# Altium PCB sinking-clock_LED-PCB.PcbDoc (part 1 of 2)
Units mm, origin at the board's own origin, x right, y up, seen from the top; angles counter-clockwise.
Board outline 156.7 x 83 mm, 2 copper layers (Top Layer, Bottom Layer); 144 components, 146 nets, 484 pads, 126 vias.
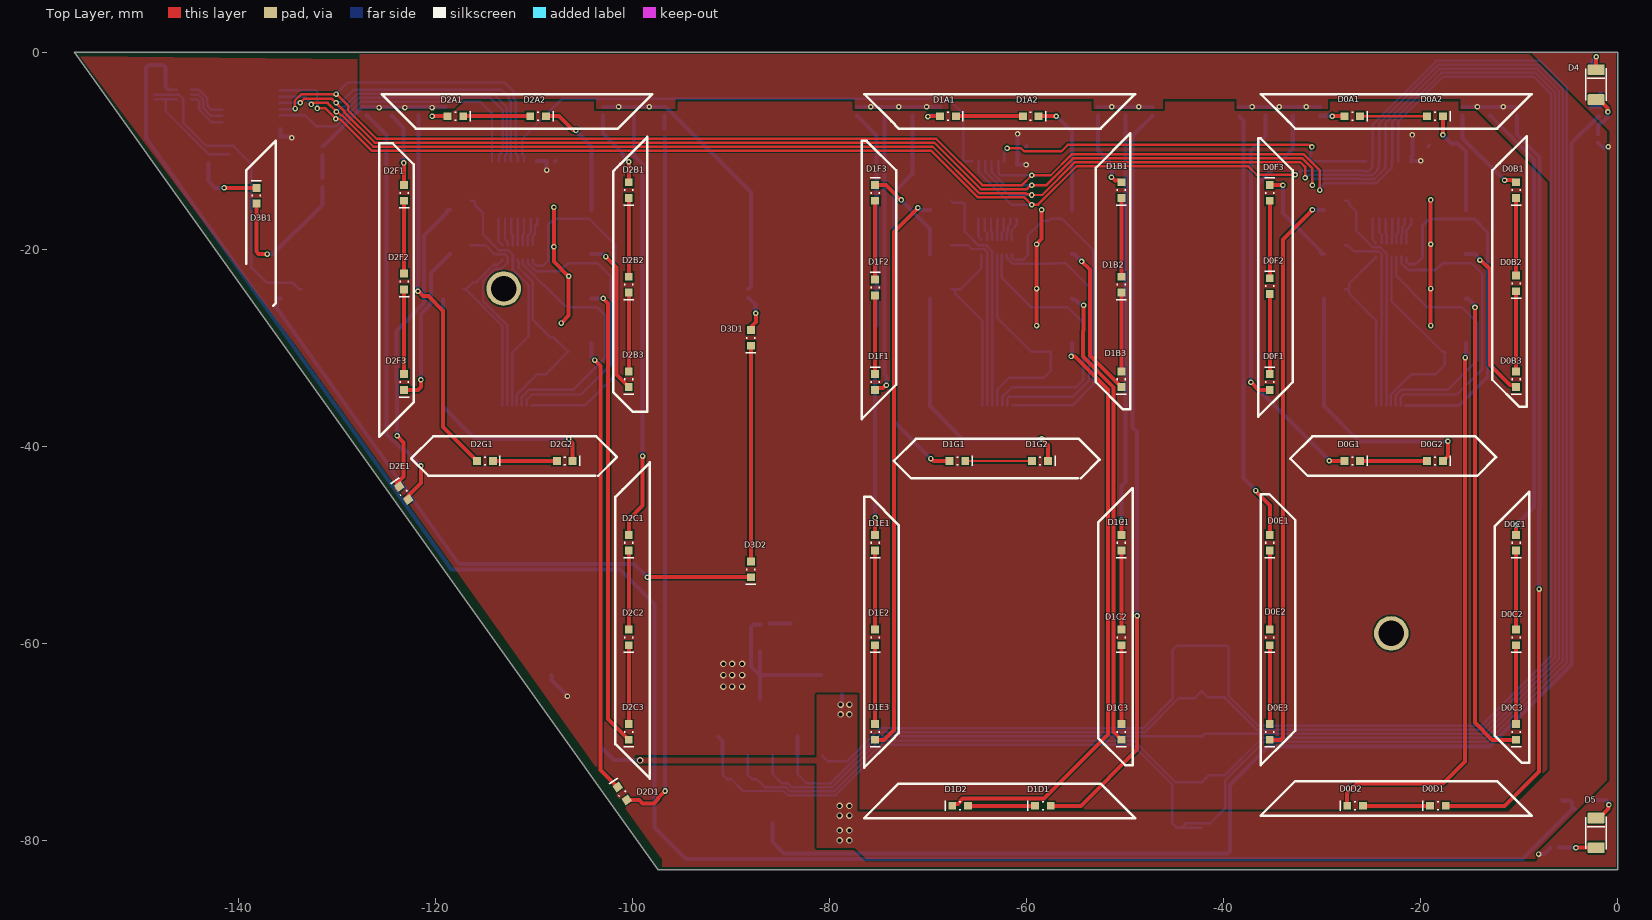
[diagram p0: Top Layer view]
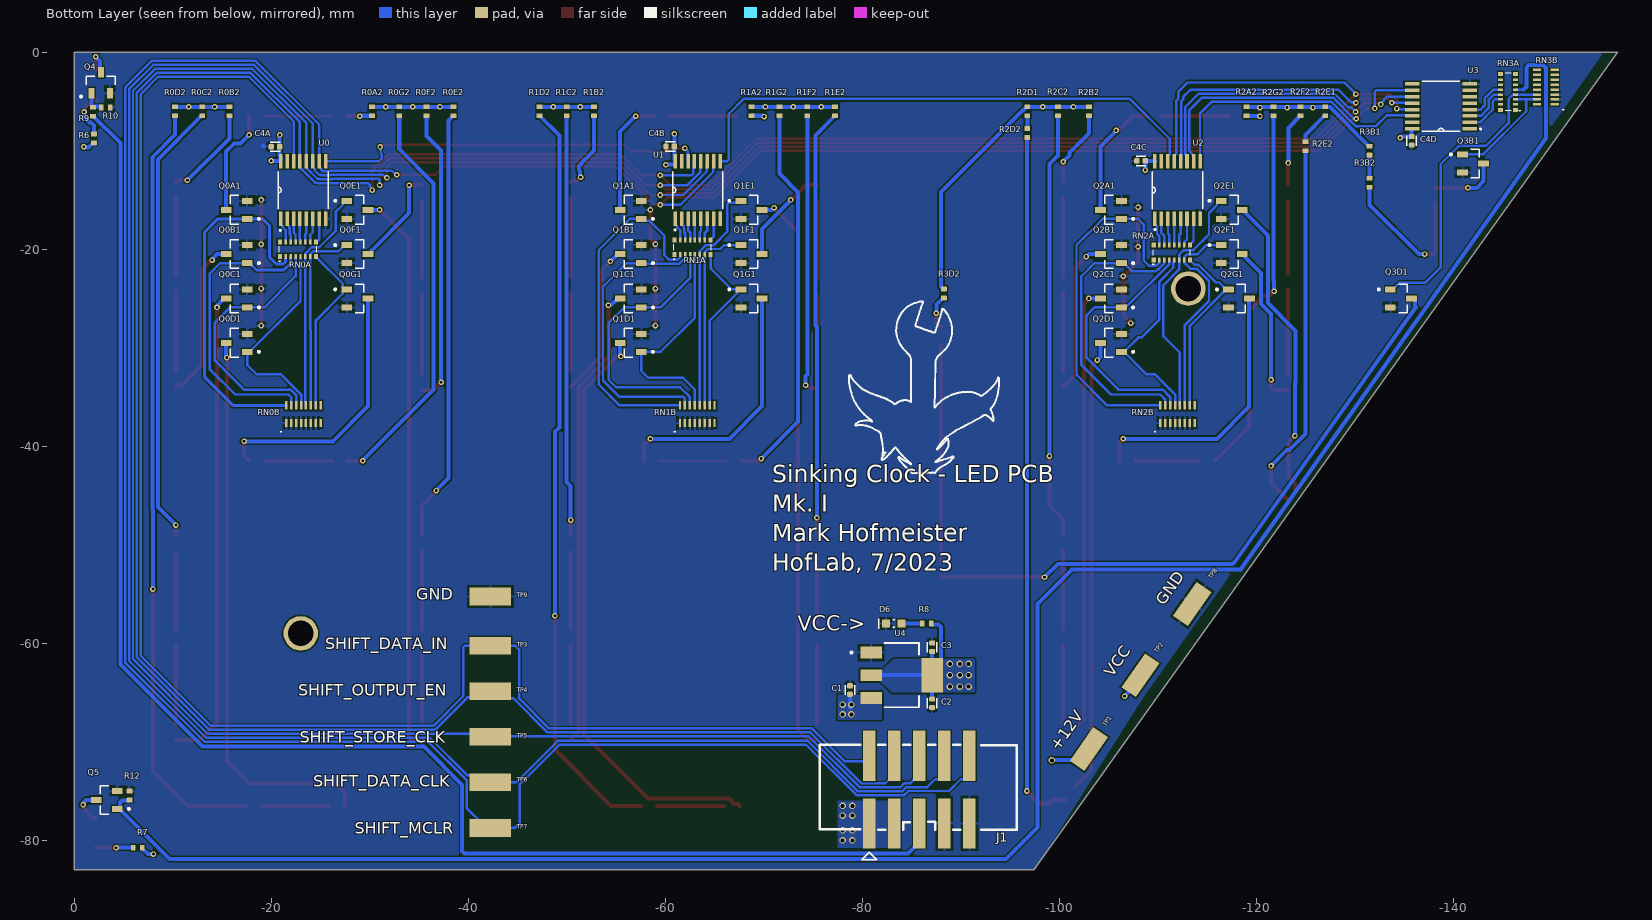
[diagram p1: Bottom Layer view, seen from below]
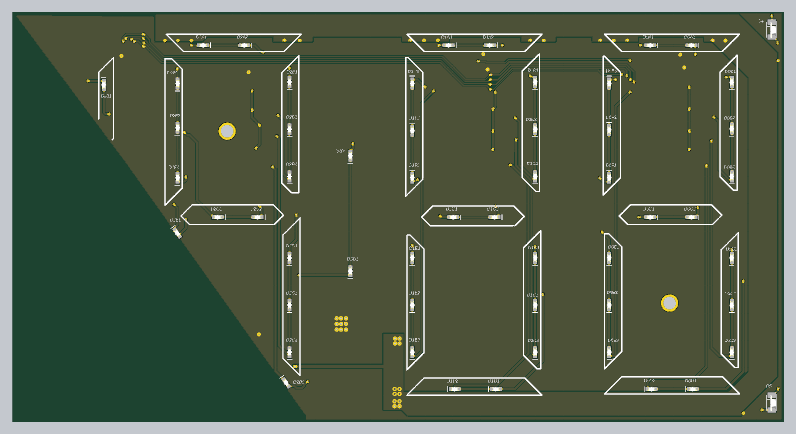
[diagram p3: 3D render of the assembled board from above, using the file's embedded part models]
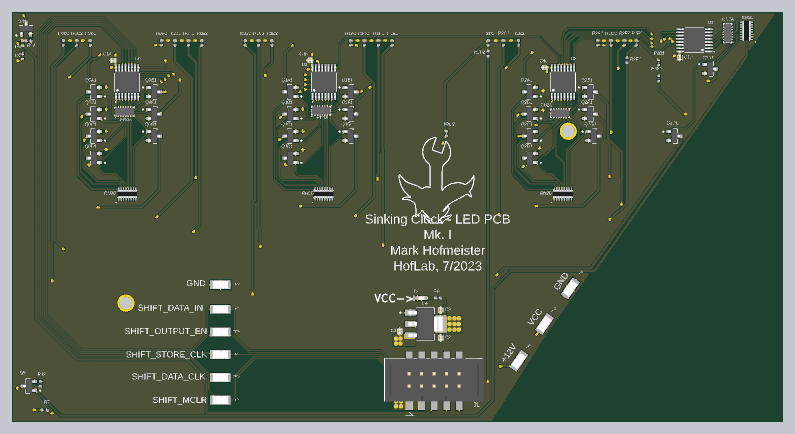
[diagram p4: 3D render of the assembled board from below, using the file's embedded part models]

## Layer stack, top to bottom
Top Solder: solder mask 0.0102, Solder Resist, Dk 3.5
Top Layer: signal copper 0.0356
Dielectric 1: dielectric 0.32, FR-4, Dk 4.8
Bottom Layer: signal copper 0.0356
Bottom Solder: solder mask 0.0102, Solder Resist, Dk 3.5

## Board outline
-97.4,-83 -156.7,0 0,0 0,-83

## Design rules (kind name [scope] priority, off if disabled: settings)
Clearance "Power Planes" [InNet('+12') vs InNet('VCC')] p1: gap=0.152 ignorepadtopadclearanceinfootprint=TRUE except(0: Arc-Hole Track-Hole SMDPad-Hole THPad-Hole Via-Hole Fill-Hole Poly-Hole Region-Hole Text-Hole; 0.254: Arc-Arc Arc-Track Arc-Fill Arc-Poly Arc-Region Track-Track Track-Fill Track-Poly Track-Region Fill-Fill Fill-Poly Fill-Region Poly-Poly Poly-Region Region-Region)
Clearance [All] p2: gap=0.152 ignorepadtopadclearanceinfootprint=FALSE except(0: Arc-Hole Track-Hole SMDPad-Hole THPad-Hole Via-Hole Fill-Hole Poly-Hole Region-Hole Text-Hole)
HoleSize [All] p1: absolutevalues=TRUE maxlimit=2.7 minlimit=0.152 maxpercent=80.000 minpercent=20.000
MinimumSolderMaskSliver [All] p1: minsoldermaskwidth=0.025
PolygonConnect PolygonConnect_2 [InNet('VCC')] p1: connectstyle=Direct reliefconductorwidth=0.254 reliefentries=4 polygonreliefangle="90 Angle" airgapwidth=0.254
PolygonConnect PolygonConnect_1 [InNet('+12')] p2: connectstyle=Direct reliefconductorwidth=0.254 reliefentries=4 polygonreliefangle="90 Angle" airgapwidth=0.254
PolygonConnect [All] p3: connectstyle=Relief reliefconductorwidth=0.254 reliefentries=4 polygonreliefangle="90 Angle" airgapwidth=0.254
RoomDefinition U_LED-PCB_DIG2 [InComponentClass('U_LED-PCB_DIG2')] p1: confinementstyle=ConfineIn formatcopy=TRUE lockcomponents=FALSE outline -127.829,-7.229 -127.829,-4.771 -95.921,-4.771 -95.921,-9.434 -99.315,-9.434 -99.315,-77.195 -102.885,-77.195 -102.885,-46.699 -125.067,-46.699 -125.067,-10.774 -125.829,-10.774 -125.829,-7.229
RoomDefinition LED-PCB_Master [InComponentClass('LED-PCB_Master')] p2: confinementstyle=ConfineIn formatcopy=TRUE lockcomponents=FALSE outline -116.097,-58.916 -116.097,-53.084 -4.679,-53.084 -4.679,-0.956 -3.579,-0.956 -3.579,-0.711 -0.821,-0.711 -0.821,-0.956 -0.246,-0.956 -0.246,-5.244 -0.821,-5.244 -0.821,-81.839 -75.319,-81.839 -75.319,-82.279 -96.081,-82.279 -96.081,-73.666 -105.597,-73.666 -105.597,-66.166 -110.847,-66.166 -110.847,-58.916
RoomDefinition U_LED-PCB_DIG1 [InComponentClass('U_LED-PCB_DIG1')] p3: confinementstyle=ConfineIn formatcopy=TRUE lockcomponents=FALSE outline -78.079,-7.229 -78.079,-4.771 -46.421,-4.771 -46.421,-7.229 -49.471,-7.229 -49.471,-70.842 -56.635,-70.842 -56.635,-77.429 -68.606,-77.429 -68.606,-70.842 -76.329,-70.842 -76.329,-35.215 -76.329,-7.229
RoomDefinition U_LED-PCB_DIG3 [InComponentClass('U_LED-PCB_DIG3')] p4: confinementstyle=ConfineIn formatcopy=TRUE lockcomponents=FALSE outline -151.532,-6.19 -151.532,-1.021 -147.536,-1.021 -147.536,-0.871 -143.578,-0.871 -143.578,-2.63 -134.737,-2.63 -134.737,-8.771 -130.671,-8.771 -130.671,-23.255 -87.449,-23.255 -87.449,-27.271 -87.071,-27.271 -87.071,-54.341 -88.929,-54.341 -88.929,-26.979 -136.824,-26.979 -136.824,-16.301 -139.129,-16.301 -139.129,-13.279 -144.144,-13.279 -144.144,-7.229 -147.536,-7.229 -147.536,-6.19
RoomDefinition U_LED-PCB_DIG0 [InComponentClass('U_LED-PCB_DIG0')] p5: confinementstyle=ConfineIn formatcopy=TRUE lockcomponents=FALSE outline -39.329,-7.229 -39.329,-4.771 -9.421,-4.771 -9.421,-12.271 -9.401,-12.271 -9.401,-70.842 -16.54,-70.842 -16.54,-77.429 -28.511,-77.429 -28.511,-70.842 -36.259,-70.842 -36.259,-35.215 -36.259,-7.229
RoutingVias [All] p1: holewidth=0.279 width=0.559 viastyle="Through Hole" minholewidth=0.203 minwidth=0.406 maxholewidth=0.711 maxwidth=1.27
SilkToSolderMaskClearance [IsPad] p1: minsilkscreentomaskgap=0.1 clearancetoexposedcopper=TRUE
SolderMaskExpansion [All] p1: expansion=0.102 istentingtop=FALSE
UnRoutedNet [All] p1: checkbadconnections=TRUE
Width [All] p1: maxlimit=1.27 minlimit=0.152 preferedwidth=0.406 minimp=50.000000 maximp=50.000000 favimp=50.000000
26 further rules are at their usual default settings.

## Classes and differential pairs
component class U_LED-PCB_DIG3: C4D D3B1 D3D1 D3D2 Q3B1 Q3D1 R3B1 R3B2 R3D2 RN3A RN3B U3
component class U_LED-PCB_DIG2: C4C D2A1 D2A2 D2B1 D2B2 D2B3 D2C1 D2C2 D2C3 D2D1 D2E1 D2F1 D2F2 D2F3 D2G1 D2G2 Q2A1 Q2B1 Q2C1 Q2D1 Q2E1 Q2F1 Q2G1 R2A2 R2B2 R2C2 R2D1 R2D2 R2E1 R2E2 R2F2 R2G2 RN2A RN2B U2
component class U_LED-PCB_DIG1: C4B D1A1 D1A2 D1B1 D1B2 D1B3 D1C1 D1C2 D1C3 D1D1 D1D2 D1E1 D1E2 D1E3 D1F1 D1F2 D1F3 D1G1 D1G2 Q1A1 Q1B1 Q1C1 Q1D1 Q1E1 Q1F1 Q1G1 R1A2 R1B2 R1C2 R1D2 R1E2 R1F2 R1G2 RN1A RN1B U1
component class U_LED-PCB_DIG0: C4A D0A1 D0A2 D0B1 D0B2 D0B3 D0C1 D0C2 D0C3 D0D1 D0D2 D0E1 D0E2 D0E3 D0F1 D0F2 D0F3 D0G1 D0G2 Q0A1 Q0B1 Q0C1 Q0D1 Q0E1 Q0F1 Q0G1 R0A2 R0B2 R0C2 R0D2 R0E2 R0F2 R0G2 RN0A RN0B U0
component class LED-PCB_Master: C1 C2 C3 D4 D5 D6 J1 Q4 Q5 R6 R7 R8 R9 R10 R12 TP1 TP2 TP3 TP4 TP5 TP6 TP7 TP8 TP9 U4

## Components (designator, comment, footprint, x,y, rotation, side; value= is the part's Value field where it differs from the comment)
C1 "CAP" "0402 CAP" -78.75,-64.75 r270 bottom value=10uF
C2 "CAP" "0402 CAP" -87.1,-66.1 r90 bottom value=10uF
C3 "CAP" "0402 CAP" -87.1,-60.408 r270 bottom value=10uF
C4A "CAP" "0402 CAP" -20.43,-9.6 r180 bottom value=1uF
C4B "CAP" "0402 CAP" -60.5,-9.575 r180 bottom value=1uF
C4C "CAP" "0402 CAP" -108.302,-11.026 r180 bottom value=1uF
C4D "CAP" "0402 CAP" -135.776,-9 r270 bottom value=1uF
D0A1 "LED - single" "LED - 0603" -26.955,-6.5 r0 top locked
D0A2 "LED - single" "LED - 0603" -18.555,-6.5 r0 top locked
D0B1 "LED - single" "LED - 0603" -10.33,-14 r270 top locked
D0B2 "LED - single" "LED - 0603" -10.33,-23.47 r270 top locked
D0B3 "LED - single" "LED - 0603" -10.33,-33.2 r270 top locked
D0C1 "LED - single" "LED - 0603" -10.33,-49.8 r270 top locked
D0C2 "LED - single" "LED - 0603" -10.33,-59.4 r270 top locked
D0C3 "LED - single" "LED - 0603" -10.33,-69 r270 top locked
D0D1 "LED - single" "LED - 0603" -18.269,-76.5 r180 top locked
D0D2 "LED - single" "LED - 0603" -26.669,-76.5 r180 top locked
D0E1 "LED - single" "LED - 0603" -35.33,-49.8 r270 top locked
D0E2 "LED - single" "LED - 0603" -35.33,-59.4 r270 top locked
D0E3 "LED - single" "LED - 0603" -35.33,-69 r270 top locked
D0F1 "LED - single" "LED - 0603" -35.33,-33.486 r90 top locked
D0F2 "LED - single" "LED - 0603" -35.33,-23.756 r90 top locked
D0F3 "LED - single" "LED - 0603" -35.33,-14.286 r90 top locked
D0G1 "LED - single" "LED - 0603" -26.955,-41.5 r0 top locked
D0G2 "LED - single" "LED - 0603" -18.555,-41.5 r0 top locked
D1A1 "LED - single" "LED - 0603" -68,-6.5 r0 top locked
D1A2 "LED - single" "LED - 0603" -59.6,-6.5 r0 top locked
D1B1 "LED - single" "LED - 0603" -50.4,-14 r270 top locked
D1B2 "LED - single" "LED - 0603" -50.4,-23.6 r270 top locked
D1B3 "LED - single" "LED - 0603" -50.4,-33.2 r270 top locked
D1C1 "LED - single" "LED - 0603" -50.4,-49.8 r270 top locked
D1C2 "LED - single" "LED - 0603" -50.4,-59.4 r270 top locked
D1C3 "LED - single" "LED - 0603" -50.4,-69 r270 top locked
D1D1 "LED - single" "LED - 0603" -58.364,-76.5 r180 top
D1D2 "LED - single" "LED - 0603" -66.764,-76.5 r180 top
D1E1 "LED - single" "LED - 0603" -75.4,-49.8 r270 top locked
D1E2 "LED - single" "LED - 0603" -75.4,-59.4 r270 top locked
D1E3 "LED - single" "LED - 0603" -75.4,-69 r270 top locked
D1F1 "LED - single" "LED - 0603" -75.4,-33.486 r90 top locked
D1F2 "LED - single" "LED - 0603" -75.4,-23.886 r90 top locked
D1F3 "LED - single" "LED - 0603" -75.4,-14.286 r90 top locked
D1G1 "LED - single" "LED - 0603" -67.05,-41.5 r0 top
D1G2 "LED - single" "LED - 0603" -58.65,-41.5 r0 top
D2A1 "LED - single" "LED - 0603" -118,-6.5 r0 top locked
D2A2 "LED - single" "LED - 0603" -109.6,-6.5 r0 top locked
D2B1 "LED - single" "LED - 0603" -100.4,-14 r270 top locked
D2B2 "LED - single" "LED - 0603" -100.4,-23.6 r270 top locked
D2B3 "LED - single" "LED - 0603" -100.4,-33.2 r270 top locked
D2C1 "LED - single" "LED - 0603" -100.4,-49.8 r270 top locked
D2C2 "LED - single" "LED - 0603" -100.4,-59.4 r270 top locked
D2C3 "LED - single" "LED - 0603" -100.4,-69 r270 top locked
D2D1 "LED - single" "LED - 0603" -101.068,-75.246 r125 top
D2E1 "LED - single" "LED - 0603" -123.25,-44.75 r125 top
D2F1 "LED - single" "LED - 0603" -123.2,-14.286 r270 top locked
D2F2 "LED - single" "LED - 0603" -123.2,-23.286 r270 top locked
D2F3 "LED - single" "LED - 0603" -123.2,-33.486 r270 top locked
D2G1 "LED - single" "LED - 0603" -115,-41.5 r0 top locked
D2G2 "LED - single" "LED - 0603" -106.9,-41.5 r0 top locked
D3B1 "LED - single" "LED - 0603" -138.2,-14.572 r90 top locked
D3D1 "LED - single" "LED - 0603" -88,-29 r270 top locked
D3D2 "LED - single" "LED - 0603" -88,-52.5 r270 top locked
D4 "LED - single" "LED - 1206 RIGHT ANGLE" -2.2,-3.3 r90 top
D5 "LED - single" "LED - 1206 RIGHT ANGLE" -2.2,-79.25 r90 top
D6 "LED - single" "LED - 0603" -83.2,-58 r0 bottom
J1 "5x2, 0.1' pitch SMT header" "5x2, 0.1' pitch SMT header" -85.8,-74.85 r180 bottom
Q0A1 "NMOS" SOT-23 -16.5,-16 r0 bottom
Q0B1 "NMOS" SOT-23 -16.5,-20.5 r0 bottom
Q0C1 "NMOS" SOT-23 -16.5,-25 r0 bottom
Q0D1 "NMOS" SOT-23 -16.5,-29.5 r0 bottom
Q0E1 "NMOS" SOT-23 -28.75,-16 r180 bottom
Q0F1 "NMOS" SOT-23 -28.75,-20.5 r180 bottom
Q0G1 "NMOS" SOT-23 -28.75,-25 r180 bottom
Q1A1 "NMOS" SOT-23 -56.5,-16 r0 bottom
Q1B1 "NMOS" SOT-23 -56.5,-20.5 r0 bottom
Q1C1 "NMOS" SOT-23 -56.5,-25 r0 bottom
Q1D1 "NMOS" SOT-23 -56.5,-29.5 r0 bottom
Q1E1 "NMOS" SOT-23 -68.75,-16 r180 bottom
Q1F1 "NMOS" SOT-23 -68.75,-20.5 r180 bottom
Q1G1 "NMOS" SOT-23 -68.75,-25 r180 bottom
Q2A1 "NMOS" SOT-23 -105.25,-16 r0 bottom
Q2B1 "NMOS" SOT-23 -105.25,-20.5 r0 bottom
Q2C1 "NMOS" SOT-23 -105.25,-25 r0 bottom
Q2D1 "NMOS" SOT-23 -105.25,-29.5 r0 bottom
Q2E1 "NMOS" SOT-23 -117.5,-16 r180 bottom
Q2F1 "NMOS" SOT-23 -117.5,-20.5 r180 bottom
Q2G1 "NMOS" SOT-23 -118.25,-25 r180 bottom
Q3B1 "NMOS" SOT-23 -142,-11.3 r180 bottom
Q3D1 "NMOS" SOT-23 -134.68,-25 r180 bottom
Q4 "NMOS" SOT-23 -2.7,-3.1 r90 bottom
Q5 "NMOS" SOT-23 -3.3,-75.9 r0 bottom
R0A2 "RES" "0402 RES" -30.25,-6 r90 bottom value=330
R0B2 "RES" "0402 RES" -15.75,-6 r90 bottom value=240
R0C2 "RES" "0402 RES" -13,-6 r90 bottom value=240
R0D2 "RES" "0402 RES" -10.25,-6 r90 bottom value=330
R0E2 "RES" "0402 RES" -38.5,-6 r90 bottom value=240
R0F2 "RES" "0402 RES" -35.75,-6 r90 bottom value=240
R0G2 "RES" "0402 RES" -33,-6 r90 bottom value=330
R1A2 "RES" "0402 RES" -68.75,-6 r90 bottom value=330
R1B2 "RES" "0402 RES" -52.75,-6 r90 bottom value=240
R1C2 "RES" "0402 RES" -50,-6 r90 bottom value=240
R1D2 "RES" "0402 RES" -47.25,-6 r90 bottom value=330
R1E2 "RES" "0402 RES" -77.25,-6 r90 bottom value=240
R1F2 "RES" "0402 RES" -74.417,-6 r90 bottom value=240
R1G2 "RES" "0402 RES" -71.583,-6 r90 bottom value=330
R2A2 "RES" "0402 RES" -119,-6 r90 bottom value=330
R2B2 "RES" "0402 RES" -103,-6 r90 bottom value=240
R2C2 "RES" "0402 RES" -99.875,-6 r90 bottom value=240
R2D1 "RES" "0402 RES" -96.75,-6 r90 bottom value=330
R2D2 "RES" "0402 RES" -96.75,-8.205 r90 bottom value=56
R2E1 "RES" "0402 RES" -127,-6 r90 bottom value=330
R2E2 "RES" "0402 RES" -125,-9.545 r90 bottom value=56
R2F2 "RES" "0402 RES" -124.5,-6 r90 bottom value=240
R2G2 "RES" "0402 RES" -121.75,-6 r90 bottom value=330
R3B1 "RES" "0402 RES" -131.5,-10 r90 bottom value=330
R3B2 "RES" "0402 RES" -131.5,-13.25 r90 bottom value=56
R3D2 "RES" "0402 RES" -88.278,-24.484 r90 bottom value=330
R6 "RES" "0402 RES" -2,-8.75 r90 bottom value=56
R7 "RES" "0402 RES" -6.455,-80.76 r0 bottom value=56
R8 "RES" "0402 RES" -86.545,-58 r180 bottom value=56
R9 "RES" 0402R -1.929,-6.054 r90 bottom value=330
R10 "RES" 0402R -3.2,-5.6 r0 bottom value=10k
R12 "RES" 0402R -5.636,-75.445 r270 bottom value=10k
RN0A "8 res Array" EXB2HV331JV -22.727,-20.01 r180 bottom value=330
RN0B "8.2k - all" MNR18ERAPJ822 -23.281,-36.75 r90 bottom
RN1A "8 res Array" EXB2HV331JV -62.77,-19.802 r180 bottom value=330
RN1B "8.2k - all" MNR18ERAPJ822 -63.25,-36.75 r90 bottom
RN2A "8 res Array" EXB2HV331JV -111.42,-20.335 r180 bottom value=330
RN2B "8.2k - all" MNR18ERAPJ822 -112,-36.75 r90 bottom
RN3A "8 res Array" EXB2HV331JV -145.557,-4.05 r90 bottom value=330
RN3B "8.2k - all" MNR18ERAPJ822 -149.4,-3.55 r0 bottom
TP1 "RCWCTE" RCWCTE -103,-70.75 r125 bottom
TP2 "RCWCTE" RCWCTE -108.25,-63.25 r125 bottom
TP3 "RCWCTE" RCWCTE -42.25,-60.25 r180 bottom
TP4 "RCWCTE" RCWCTE -42.25,-64.875 r180 bottom
TP5 "RCWCTE" RCWCTE -42.25,-69.5 r180 bottom
TP6 "RCWCTE" RCWCTE -42.25,-74.125 r180 bottom
TP7 "RCWCTE" RCWCTE -42.25,-78.75 r180 bottom
TP8 "RCWCTE" RCWCTE -113.5,-56 r125 bottom
TP9 "RCWCTE" RCWCTE -42.25,-55.25 r180 bottom
U0 "74HC595PW,118" 16-TSSOP -23.25,-14 r90 bottom
U1 "74HC595PW,118" 16-TSSOP -63.3,-14 r90 bottom
U2 "74HC595PW,118" 16-TSSOP -112,-14 r90 bottom
U3 "74HC595PW,118" 16-TSSOP -138.75,-5.5 r0 bottom
U4 "AZ1117IH-3.3TRG1" SOT-223-3 -84,-63.25 r180 bottom

## Footprints (in the part's own frame and the unit in brackets; to place one, negate y for a bottom-side part, rotate by r counter-clockwise, add the part's x,y. Pads: shape width x height; smd on the part's side, far side on the other; paste and mask are expansions set on the pad)
"5x2, 0.1' pitch SMT header" [mil] "CONN HEADER SMD 10POS 2.54MM"
  rect 50x200 smd: 1(-200,-135) 2(-200,135) 3(-100,-135) 4(-100,135) 5(0,-135) 6(0,135) 7(100,-135) 8(100,135) 9(200,-135) 10(200,135)
  silkscreen extent -398,-280 390,178, body extent -396,-165 394,180, height 496
16-TSSOP [mil]
  rect 58x14 smd: 1(-115,90) 2(-115,64) 3(-115,38) 4(-115,13) 5(-115,-13) 6(-115,-38) 7(-115,-64) 8(-115,-90) 9(115,-90) 10(115,-64) 11(115,-38) 12(115,-13) 13(115,13) 14(115,38) 15(115,64) 16(115,90)
  silkscreen extent -74,-100 74,100, body extent -126,-98 126,98, height 43
"0402 CAP" [mm] "0402 SMT Capacitor"
  rrect53% 0.54x0.6 smd: 1(-0.43,0) 2(0.43,0)
  silkscreen extent -0.5,-0.48 0.5,0.48, body extent -0.5,-0.25 0.5,0.25, height 0.5
"0402 RES" [mm] "0402 SMT Resistor"
  rrect20% 0.49x0.6 smd: 1(-0.455,0) 2(0.455,0)
  body extent -0.75,-0.25 0.75,0.25, height 0.35
0402R [mm] "0402 SMT Resistor"
  rrect20% 0.49x0.6 smd: 1(-0.455,0) 2(0.455,0)
  body extent -0.75,-0.25 0.75,0.25, height 0.35
EXB2HV331JV [mm] "330 Res Array"
  rect 0.425x0.5 smd mask+0.102: 1(-1.837,-0.75) 8(1.837,-0.75) 9(1.837,0.75) 16(-1.837,0.75)
  rect 0.25x0.5 smd mask+0.102: 2(-1.25,-0.75) 3(-0.75,-0.75) 4(-0.25,-0.75) 5(0.25,-0.75) 6(0.75,-0.75) 7(1.25,-0.75) 10(1.25,0.75) 11(0.75,0.75) 12(0.25,0.75) 13(-0.25,0.75) 14(-0.75,0.75) 15(-1.25,0.75)
  silkscreen extent -1.92,-1.25 1.9,0.3, body extent -2.01,-0.97 2.01,0.98, height 0.65
"LED - 0603" [mm]
  rect 0.8x0.8 smd: 1(-0.8,0) 2(0.8,0)
  silkscreen extent -0.08,-0.51 1.52,0.51, body extent -0.8,-0.35 0.8,0.35, height 0.7
"LED - 1206 RIGHT ANGLE" [mm]
  rrect20% 1.1x1.73 smd: 1(-1.51,0) 2(1.51,0)
  silkscreen extent -1.65,-1.04 1.65,1.04, body extent -1.73,-0.82 1.47,0.28, height 1.56
MNR18ERAPJ822 [mm] "Chip Array, Concave, 16-Leads, Pitch 0.50mm,  Body 4.00x1.60mm,  IPC Medium Density"
  rect 0.85x0.25 smd mask+0.06: 1(-0.9,1.75) 2(-0.9,1.25) 3(-0.9,0.75) 4(-0.9,0.25) 5(-0.9,-0.25) 6(-0.9,-0.75) 7(-0.9,-1.25) 8(-0.9,-1.75) 9(0.9,-1.75) 10(0.9,-1.25) 11(0.9,-0.75) 12(0.9,-0.25) 13(0.9,0.25) 14(0.9,0.75) 15(0.9,1.25) 16(0.9,1.75)
  silkscreen extent -1.83,2.24 -1.73,2.34, body extent -0.85,-2 0.85,2, height 0.6
RCWCTE [mm]
  rect 4.2x1.8 smd: 1(0,0)
  body extent -1.6,-0.8 1.6,0.8, height 2.01
SOT-23 [mm]
  rect 1.09x0.61 smd: 1(-1.07,0.915) 2(-1.07,-0.915) 3(1.07,0)
  silkscreen extent -2.35,-1.45 0.65,1.45, body extent -1.2,-1.45 1.2,1.45, height 1.2
SOT-223-3 [mm]
  rect 2.2x1.2 smd: 1(-3.1,2.3) 2(-3.1,0) 3(-3.1,-2.3)
  rect 2.2x3.5 smd: 4(3.1,0)
  silkscreen extent -5.2,-3.25 1.75,3.25, body extent -3.5,-3.25 3.5,3.25, height 1.65

## Part data
C1 C2 C3: "Capaicitor", Part Number=GRM155R61A106ME11D
C4A C4B C4C C4D: "Capaicitor", Part Number=CL05A105KP5NNNC
D0A1 D0A2 D0B1 D0B2 D0B3 D0C1 D0C2 D0C3 D0D1 D0D2 D0E1 D0E2 D0E3 D0F1 D0F2 D0F3 D0G1 D0G2 D1A1 D1A2 D1B1 D1B2 D1B3 D1C1 D1C2 D1C3 D1D1 D1D2 D1E1 D1E2 D1E3 D1F1 D1F2 D1F3 D1G1 D1G2 D2A1 D2A2 D2B1 D2B2 D2B3 D2C1 D2C2 D2C3 D2D1 D2E1 D2F1 D2F2 D2F3 D2G1 D2G2 D3B1 D3D1 D3D2: Color=Red, Part Number=150060RS75000
D4 D5: Color=Red, Part Number=155124RS73200
D6: Color=Green, Part Number=5988070107F
J1: "CONN HEADER SMD 10POS 2.54MM", Part Number=3020-10-0300-00
Q0A1 Q0B1 Q0C1 Q0D1 Q0E1 Q0F1 Q0G1 Q1A1 Q1B1 Q1C1 Q1D1 Q1E1 Q1F1 Q1G1 Q2A1 Q2B1 Q2C1 Q2D1 Q2E1 Q2F1 Q2G1 Q3B1 Q3D1 Q4 Q5: "N-Channel MOSFET", Part Number=DMN63D8L
R0A2 R0D2 R0G2 R1A2 R1D2 R1G2 R2A2 R2D1 R2E1 R2G2 R3B1 R3D2: "Resistor", Part Number=RC0402JR-13330RL
R0B2 R0C2 R0E2 R0F2 R1B2 R1C2 R1E2 R1F2 R2B2 R2C2 R2F2: "Resistor", Part Number=RC0402FR-07240RL
R2D2 R2E2 R3B2 R6 R7: "Resistor", Part Number=RC0402FR-0756RL
R8: "Resistor", MFR PN=RC0402FR-0756RL
R9 R10 R12: "Resistor"
RN0B RN1B RN2B RN3B: library part MNR18ERAPJ822, "8.2k Ohm ±5% 62.5mW Power Per Element Isolated 8 Resistor Network/Array ±250ppm/°C 1606, Convex, Long Side Terminals", Part Number=MNR18ERAPJ822
TP1 TP2 TP3 TP4 TP5 TP6 TP7 TP8 TP9: library part "Test Point", Part Number=RCWCTE
U0 U1 U2 U3: "Shift Shift Register 1 Element 8 Bit 16-TSSOP", Part Number=74HC595PW,118
U4: "IC REG LINEAR 3.3V 1A SOT223", Part Number=AZ1117IH-3.3TRG1
RN0A RN1A RN2A RN3A: ComponentLink1Description="New link", ComponentLink2Description="New link 1"

## Free pads (board coordinates)
  round 3.5 hole 2.6: 1(-113.1,-24) 2(-23,-59)

## Via types
v1: diameter 0.559, hole 0.279, Top Layer to Bottom Layer, 104 vias
v2: diameter 0.66, hole 0.406, Top Layer to Bottom Layer, 22 vias

## Nets (pads, with @x,y where several pads share a name; then routed paths per layer and width w, separated by ;. In a path a pad name is that pad's centre, name@x,y a point inside that pad or via, vN(x,y) a via of type N, cw(c..) or ccw(c..) an arc to the next point about the centre after c; other vN are vias at no path point)
+12: C1.2 J1.1 J1.3 R0A2.2 R0B2.2 R0C2.2 R0D2.2 R0E2.2 R0F2.2 R0G2.2 R1A2.2 R1B2.2 R1C2.2 R1D2.2 R1E2.2 R1F2.2 R1G2.2 R2A2.2 R2B2.2 R2C2.2 R2D1.2 R2E1.2 R2F2.2 R2G2.2 R3B1.2 R3D2.2 TP1.1 U4.3 | length 76.1
  Bottom Layer w0.406: R3B1.2@-131.5,-9.545 -131.458,-9.503 -131.403,-9.503 -127.487,-5.587 -127.042,-5.587 R2E1.2@-127,-5.545 -125.867,-5.545 -125.791,-5.621 v1(-125.75,-5.621) ; v1@-125.75,-5.545 R2F2.2@-124.5,-5.545 -123.242,-5.545 -123.166,-5.621 v1(-123.125,-5.621) ; v1@-123.125,-5.545 R2G2.2@-121.75,-5.545 -120.492,-5.545 -120.416,-5.621 v1(-120.375,-5.621) ; v1@-120.375,-5.545 R2A2.2@-119,-5.545 ; TP1.1@-103,-70.75 -101.899,-71.851 -99.294,-71.851 v2(-99.245,-71.9) ; R2B2.2@-103,-5.545 v1(-101.437,-5.545) R2C2.2@-99.875,-5.545 v1(-98.312,-5.545) R2D1.2@-96.75,-5.545 -96.695,-5.545 -96.386,-5.854 -96.331,-5.854 -88,-14.186 -88,-23.807 -88.223,-24.029 R3D2.2@-88.278,-24.029 ; v2@-78.75,-66.5 C1.2@-78.75,-65.18 ; R1E2.2@-77.25,-5.545 v1(-75.833,-5.545) R1F2.2@-74.417,-5.545 v1(-73,-5.545) R1G2.2@-71.583,-5.545 v1(-70.167,-5.545) R1A2.2@-68.75,-5.545 ; R1B2.2@-52.75,-5.545 v1(-51.375,-5.545) R1C2.2@-50,-5.545 v1(-48.625,-5.545) R1D2.2@-47.25,-5.545 ; R0E2.2@-38.5,-5.545 v1(-37.125,-5.545) R0F2.2@-35.75,-5.545 v1(-34.375,-5.545) R0G2.2@-33,-5.545 v1(-31.625,-5.545) R0A2.2@-30.25,-5.545 ; R0B2.2@-15.75,-5.545 v1(-14.25,-5.545) R0C2.2@-13,-5.545 v1(-11.625,-5.545) R0D2.2@-10.25,-5.545
  other v2: -79,-80 -78,-80 -79,-79 -78,-79 -79,-77.5 -78,-77.5 -79,-76.5 -78,-76.5 -78.907,-67.225 -78,-67.225 -78.907,-66.225 -78,-66.225
Alarm_LED: J1.5 R9.1 | length 152.2
  Bottom Layer w0.406: J1.5@-85.8,-78.279 -85.8,-80.184 -84.643,-81.341 -39.63,-81.341 -39.392,-81.103 -39.392,-74.392 -35.5,-70.5 -13.044,-70.5 -4.687,-62.143 -4.687,-9.213 -1.984,-6.509 R9.1@-1.929,-6.509
AM/PM_LED: Q5.1 R12.2 RN3A.5 | length 209.7
  Bottom Layer w0.25: -147.121,-3.8 RN3A.5@-146.307,-3.8
  Bottom Layer w0.406: -147.121,-3.8 -147.404,-3.517 -147.404,-1.557 -147.642,-1.32 -149.122,-1.32 -149.4,-1.597 -149.4,-8.742 -118.531,-52.357 -118.507,-52.381 -118.388,-52.5 -101.3,-52.5 -97.8,-56 -97.8,-78.7 -94.6,-81.9 -9.695,-81.9 -4.61,-76.815 Q5.1@-4.37,-76.815 -4.532,-76.815 -4.634,-76.713 -4.634,-76.18 -4.872,-75.942 -5.595,-75.942 R12.2@-5.636,-75.9
DIG0_SEGA: Q0A1.1 RN0A.2 RN0B.16 | length 37.2
  Bottom Layer w0.305: RN0B.16@-21.531,-35.85 -16.1,-35.85 -13.25,-33 -13.25,-18.25 -14.585,-16.915 Q0A1.1@-17.57,-16.915 -19.127,-16.915 -19.825,-17.613 -19.825,-20.81 -20.523,-21.508 -21.243,-21.508 -21.451,-21.3 -21.451,-20.921 RN0A.2@-21.47,-20.902
DIG0_SEGB: Q0B1.1 RN0A.3 RN0B.15 | length 29.9
  Bottom Layer w0.25: RN0B.15@-22.031,-35.85 -22.031,-35.031 -21.75,-34.75 -16.35,-34.75 -13.75,-32.15 -13.75,-22.5 -14.835,-21.415 Q0B1.1@-17.57,-21.415
  Bottom Layer w0.305: RN0A.3@-21.977,-20.76 -21.95,-20.788 -21.95,-21.448 -21.274,-22.123 -18.518,-22.123 -17.81,-21.415 Q0B1.1@-17.57,-21.415
DIG0_SEGC: Q0C1.1 RN0A.4 RN0B.14 | length 26.7
  Bottom Layer w0.25: RN0B.14@-22.531,-35.85 -22.531,-34.819 -21.962,-34.25 -17.25,-34.25 -14.25,-31.25 -14.25,-27.5 -15.835,-25.915 Q0C1.1@-17.57,-25.915 -19.302,-25.915 -22.477,-22.74 RN0A.4@-22.477,-20.76
DIG0_SEGD: Q0D1.1 RN0A.5 RN0B.13 | length 21.2
  Bottom Layer w0.25: RN0B.13@-23.031,-35.85 -23.031,-34.75 -20.954,-32.673 -18.483,-32.673 -17.57,-31.76 Q0D1.1@-17.57,-30.415 -17.81,-30.415 -22.977,-25.248 RN0A.5@-22.977,-20.76
DIG0_SEGE: Q0E1.1 RN0A.6 RN0B.12 | length 23.1
  Bottom Layer w0.25: Q0E1.1@-27.68,-15.085 -27.44,-15.085 -27.26,-15.265 -27.26,-15.505 -26.533,-16.232 -26.533,-18.146 -24.874,-19.805 -24.096,-19.805 -23.477,-20.423 RN0A.6@-23.477,-20.76 -23.477,-35.496 -23.531,-35.55 RN0B.12@-23.531,-35.85
DIG0_SEGF: Q0F1.1 RN0A.7 RN0B.11 | length 19.5
  Bottom Layer w0.25: Q0F1.1@-27.68,-19.585 -27.44,-19.585 -26.818,-20.207 -24.262,-20.207 -23.977,-20.492 RN0A.7@-23.977,-20.76 -23.977,-28.19 -24.031,-28.245 RN0B.11@-24.031,-35.85
DIG0_SEGG: Q0G1.1 RN0A.8 RN0B.10 | length 17.7
  Bottom Layer w0.25: Q0G1.1@-27.68,-24.085 Q0G1.1@-27.44,-24.085 ; RN0A.8@-24.564,-20.76 -24.564,-20.798 -27.26,-23.494 -27.26,-23.905 Q0G1.1@-27.44,-24.085 ; RN0B.10@-24.531,-35.85 -24.531,-27.234 -27.26,-24.505 -27.26,-24.265 Q0G1.1@-27.44,-24.085
DIG1_SEGA: Q1A1.1 RN1A.2 RN1B.16 | length 35.6
  Bottom Layer w0.25: RN1A.2@-61.52,-20.552 -61.52,-20.82 -61.26,-21.08 -60.38,-21.08 -59.895,-20.595 -59.895,-18.622 -58.368,-17.095 -57.75,-17.095 Q1A1.1@-57.57,-16.915 -56.42,-16.915 -53.25,-20.085 -53.25,-33.75 -55.35,-35.85 RN1B.16@-61.5,-35.85
DIG1_SEGB: Q1B1.1 RN1A.3 RN1B.15 | length 29.2
  Bottom Layer w0.25: RN1A.3@-62.02,-20.552 -62.02,-20.889 -61.414,-21.495 -57.65,-21.495 Q1B1.1@-57.57,-21.415 -56.085,-21.415 -53.683,-23.817 -53.683,-33.333 -55.35,-35 -61.854,-35 -62,-35.146 RN1B.15@-62,-35.85
DIG1_SEGC: Q1C1.1 RN1A.4 RN1B.14 | length 28.1
  Bottom Layer w0.25: RN1A.4@-62.52,-20.552 -62.52,-22.92 -59.525,-25.915 Q1C1.1@-57.57,-25.915 -55.835,-25.915 -54.25,-27.5 -54.25,-33.25 -55.017,-34.017 -61.517,-34.017 -62.5,-35 RN1B.14@-62.5,-35.85
DIG1_SEGD: Q1D1.1 RN1A.5 RN1B.13 | length 23
  Bottom Layer w0.25: RN1A.5@-63.02,-20.552 -63.02,-26.92 -59.525,-30.415 Q1D1.1@-57.57,-30.415 -57.57,-32.355 -58.268,-33.052 -61.802,-33.052 -63,-34.25 RN1B.13@-63,-35.85
DIG1_SEGE: Q1E1.1 RN1A.6 RN1B.12 | length 23.6
  Bottom Layer w0.25: Q1E1.1@-67.68,-15.085 -67.5,-15.265 -66.443,-15.265 -66.297,-15.411 -66.297,-18.217 -64.934,-19.58 -64.156,-19.58 -63.52,-20.215 RN1A.6@-63.52,-20.552 -63.52,-35.53 -63.5,-35.55 RN1B.12@-63.5,-35.85
DIG1_SEGF: Q1F1.1 RN1A.7 RN1B.11 | length 19.5
  Bottom Layer w0.25: Q1F1.1@-67.68,-19.585 -65.99,-19.585 -65.593,-19.982 -64.322,-19.982 -64.02,-20.284 RN1A.7@-64.02,-20.552 -64.02,-20.677 -64,-20.697 RN1B.11@-64,-35.85
DIG1_SEGG: Q1G1.1 RN1A.8 RN1B.10 | length 18.3
  Bottom Layer w0.25: Q1G1.1@-67.68,-24.085 Q1G1.1@-67.44,-24.085 ; RN1A.8@-64.607,-20.552 -64.607,-21.938 -66.754,-24.085 Q1G1.1@-67.44,-24.085 ; RN1B.10@-64.5,-35.85 -64.5,-27.265 -67.26,-24.505 -67.26,-24.265 Q1G1.1@-67.44,-24.085
DIG2_SEGA: Q2A1.1 RN2A.2 RN2B.16 | length 37
  Bottom Layer w0.25: RN2B.16@-110.25,-35.85 -104.85,-35.85 -101.75,-32.75 -101.75,-19.585 -104.42,-16.915 Q2A1.1@-106.32,-16.915 -107.994,-16.915 -108.569,-17.49 -108.569,-21.129 -109.138,-21.698 -109.701,-21.698 -109.786,-21.612 -109.91,-21.612 -110.17,-21.353 RN2A.2@-110.17,-21.085
DIG2_SEGB: Q2B1.1 RN2A.3 RN2B.15 | length 29.5
  Bottom Layer w0.25: RN2B.15@-110.75,-35.85 -110.75,-35.25 -110.25,-34.75 -105.25,-34.75 -102.25,-31.75 -102.25,-22.75 -103.585,-21.415 Q2B1.1@-106.32,-21.415 -106.56,-21.415 -107.37,-22.225 -109.798,-22.225 -110.009,-22.015 -110.077,-22.015 -110.67,-21.422 RN2A.3@-110.67,-21.085
DIG2_SEGC: Q2C1.1 RN2A.4 RN2B.14 | length 26.3
  Bottom Layer w0.25: RN2B.14@-111.25,-35.85 -111.25,-35 -110.5,-34.25 -106,-34.25 -102.75,-31 -102.75,-26.75 -103.585,-25.915 Q2C1.1@-106.32,-25.915 -106.5,-25.735 -106.926,-25.735 -111.17,-21.491 RN2A.4@-111.17,-21.085
DIG2_SEGD: Q2D1.1 RN2A.5 RN2B.13 | length 19.7
  Bottom Layer w0.25: RN2B.13@-111.75,-35.85 -111.75,-34.75 -109.673,-32.673 -108.818,-32.673 -106.56,-30.415 -108.025,-28.95 -108.35,-28.95 -110.17,-27.13 -110.17,-23.282 -110.46,-22.992 -111.572,-21.88 -111.572,-21.356 -111.572,-21.308 -111.67,-21.21 RN2A.5@-111.67,-21.085
DIG2_SEGE: Q2E1.1 RN2A.6 RN2B.12 | length 24.6
  Bottom Layer w0.25: Q2E1.1@-116.43,-15.085 -116.19,-15.085 -116.01,-15.265 -116.01,-15.505 -115.2,-16.315 -115.2,-18.497 -113.584,-20.112 -112.619,-20.112 -112.17,-20.561 RN2A.6@-112.17,-21.085 -112.17,-22.063 -110.572,-23.661 -110.572,-28.839 -112.25,-30.516 RN2B.12@-112.25,-35.85
DIG2_SEGF: Q2F1.1 RN2A.7 RN2B.11 | length 21.7
  Bottom Layer w0.25: Q2F1.1@-116.43,-19.585 -114.956,-19.585 -114.026,-20.515 -112.972,-20.515 -112.67,-20.817 RN2A.7@-112.67,-21.085 -112.67,-21.353 -113.29,-21.973 -113.94,-21.973 -115.2,-23.233 -115.2,-25.256 -112.75,-27.706 RN2B.11@-112.75,-35.85
DIG2_SEGG: Q2G1.1 RN2A.8 RN2B.10 | length 18.5
  Bottom Layer w0.25: Q2G1.1@-117.18,-24.085 Q2G1.1@-116.94,-24.085 ; RN2A.8@-113.257,-21.085 -113.257,-21.123 -113.704,-21.57 -114.106,-21.57 -115.918,-23.382 -116.237,-23.382 Q2G1.1@-116.94,-24.085 ; RN2B.10@-113.25,-35.85 -113.25,-27.775 Q2G1.1@-116.94,-24.085
DIG3_SEGB: Q3B1.1 RN3A.3 RN3B.15 | length 11.7
  Bottom Layer w0.25: RN3B.15@-148.5,-4.8 -147.404,-4.8 ; RN3A.3@-146.307,-4.8 -147.404,-4.8 ; Q3B1.1@-140.93,-10.385 -143.015,-10.385 -147.404,-5.996 -147.404,-4.8
GND: C1.1 C2.1 C3.1 C4A.1 C4B.1 C4C.1 C4D.2 D6.2 J1.7 J1.9 Q0A1.2 Q0B1.2 Q0C1.2 Q0D1.2 Q0E1.2 Q0F1.2 Q0G1.2 Q1A1.2 Q1B1.2 Q1C1.2 Q1D1.2 Q1E1.2 Q1F1.2 Q1G1.2 Q2A1.2 Q2B1.2 Q2C1.2 Q2D1.2 Q2E1.2 Q2F1.2 Q2G1.2 Q3B1.2 Q3D1.2 Q4.2 Q5.2 R10.1 R12.1 RN0B.1 RN0B.2 RN0B.3 RN0B.4 RN0B.5 RN0B.6 RN0B.7 RN1B.1 RN1B.2 RN1B.3 RN1B.4 RN1B.5 RN1B.6 RN1B.7 RN2B.1 RN2B.2 RN2B.3 RN2B.4 RN2B.5 RN2B.6 RN2B.7 RN3B.2 RN3B.3 TP8.1 TP9.1 U0.8 U1.8 U2.8 U3.8 U4.1 | length 37.6
  Top Layer w0.406: v1(-108,-15.75) v1(-108,-19.75) -108,-21.25 v1(-106.5,-22.75) -106.5,-26.75 v1(-107.25,-27.5) ; v1(-59,-27.75) v1(-59,-24) v1(-59,-19.5) -59,-19.459 -58.5,-18.959 v1(-58.5,-16) ; v1(-19,-27.75) v1(-19,-24) -18.994,-23.994 -18.994,-19.506 v1(-18.988,-19.5) ; v1@-19,-19.5 v1(-19,-15)
  Bottom Layer w0.406: C4C.1@-107.872,-11.026 C4C.1@-107.859,-11.04 ; C4B.1@-60.07,-9.575 C4B.1@-60.024,-9.529 ; -19.25,-9.6 -19.15,-9.5
LED_Colons: Q3D1.1 RN3A.4 RN3B.14 | length 30.7
  Bottom Layer w0.25: RN3B.14@-148.5,-4.3 RN3A.4@-146.307,-4.3 -146.04,-4.3 -145.606,-4.734 -145.606,-7.199 -143.305,-9.5 -140.573,-9.5 -138.7,-11.373 -138.7,-21.862 -137.162,-23.4 -134.535,-23.4 -133.85,-24.085 Q3D1.1@-133.61,-24.085
NetD0A1_1: D0A1.1 R0A2.1 | length 2.5
  Top Layer w0.406: v1(-29,-6.5) D0A1.1@-27.755,-6.5
  Bottom Layer w0.406: R0A2.1@-30.25,-6.455 -29.045,-6.455 v1(-29,-6.5)
NetD0A1_2: D0A1.2 D0A2.1 | length 6.8
  Top Layer w0.25: D0A1.2@-26.155,-6.5 D0A2.1@-19.355,-6.5
NetD0A2_2: D0A2.2 Q0A1.3 | length 10.8
  Top Layer w0.406: v1(-17.755,-8.4) D0A2.2@-17.755,-6.5
  Bottom Layer w0.406: v1(-17.755,-8.4) -16.905,-9.25 -16.25,-9.25 -15.43,-10.07 Q0A1.3@-15.43,-16
NetD0B1_1: D0B1.1 R0B2.1 | length 9.6
  Top Layer w0.406: v1(-11.5,-13) -10.765,-13 -10.762,-13.003 -10.527,-13.003 D0B1.1@-10.33,-13.2
  Bottom Layer w0.406: R0B2.1@-15.75,-6.455 -15.75,-8.75 v1(-11.5,-13)
NetD0B1_2: D0B1.2 D0B2.1 | length 7.9
  Top Layer w0.406: D0B2.1@-10.33,-22.67 D0B1.2@-10.33,-14.8
NetD0B2_2: D0B2.2 D0B3.1 | length 8.1
  Top Layer w0.406: D0B3.1@-10.33,-32.4 D0B2.2@-10.33,-24.27
NetD0B3_2: D0B3.2 Q0B1.3 | length 16.5
  Top Layer w0.406: v1(-14,-21.1) -13.959,-21.1 -13.355,-21.704 -13.296,-21.704 -13,-22 -13,-31.75 -10.947,-33.803 -10.527,-33.803 D0B3.2@-10.33,-34
  Bottom Layer w0.406: Q0B1.3@-15.43,-20.5 -14.5,-20.5 -14.029,-20.971 -14.029,-21.071 v1(-14,-21.1)
NetD0C1_1: D0C1.1 R0C2.1 | length 45.2
  Top Layer w0.406: D0C1.1@-10.33,-49 v1(-10.33,-48)
  Bottom Layer w0.406: R0C2.1@-13,-6.455 -12.945,-6.455 -8.5,-10.9 -8.5,-46.17 v1(-10.33,-48)
NetD0C1_2: D0C1.2 D0C2.1 | length 7.6
  Top Layer w0.406: D0C2.1@-10.33,-58.6 D0C1.2@-10.33,-51
NetD0C2_2: D0C2.2 D0C3.1 | length 8
  Top Layer w0.406: D0C3.1@-10.33,-68.2 D0C2.2@-10.33,-60.2
NetD0C3_2: D0C3.2 Q0C1.3 | length 48.5
  Top Layer w0.406: v1(-14.5,-25.915) -14.5,-68.05 -12.75,-69.8 D0C3.2@-10.33,-69.8
  Bottom Layer w0.406: Q0C1.3@-15.43,-25 -15.19,-25 -14.529,-25.661 -14.529,-25.886 v1(-14.5,-25.915)
NetD0D1_1: D0D1.1 R0D2.1 | length 78.4
  Top Layer w0.406: D0D1.1@-17.469,-76.5 -11.5,-76.5 -8,-73 v1(-8,-54.5)
  Bottom Layer w0.406: R0D2.1@-10.25,-6.455 -10.25,-8.36 -7.941,-10.669 -7.941,-46.402 -8,-46.46 v1(-8,-54.5)
NetD0D1_2: D0D1.2 D0D2.1 | length 6.8
  Top Layer w0.406: D0D2.1@-25.869,-76.5 D0D1.2@-19.069,-76.5
NetD0D2_2: D0D2.2 Q0D1.3 | length 57.1
  Top Layer w0.406: D0D2.2@-27.469,-76.5 -27.469,-75.219 -26.5,-74.25 -17.75,-74.25 -15.5,-72 v1(-15.5,-31)
  Bottom Layer w0.406: v1(-15.5,-31) -15.43,-30.93 Q0D1.3@-15.43,-29.5
NetD0E1_1: D0E1.1 R0E2.1 | length 43.7
  Top Layer w0.406: v1(-36.75,-44.5) -36.721,-44.529 -36.721,-44.609 -35.33,-46 D0E1.1@-35.33,-49
  Bottom Layer w0.406: R0E2.1@-38.403,-6.552 -38,-6.955 -38,-43.25 v1(-36.75,-44.5)
NetD0E1_2: D0E1.2 D0E2.1 | length 8
  Top Layer w0.406: D0E2.1@-35.33,-58.6 D0E1.2@-35.33,-50.6
NetD0E2_2: D0E2.2 D0E3.1 | length 7.5
  Top Layer w0.406: D0E3.1@-35.33,-68 D0E2.2@-35.33,-60.5
NetD0E3_2: D0E3.2 Q0E1.3 | length 57.4
  Top Layer w0.406: D0E3.2@-35.33,-69.8 -34.238,-69.8 -34,-69.562 -34,-19 v1(-31,-16)
  Bottom Layer w0.406: v1(-31,-16) Q0E1.3@-29.82,-16
NetD0F1_1: D0F1.1 R0F2.1 | length 29.9
  Top Layer w0.406: v1(-37.25,-33.5) -36.464,-34.286 D0F1.1@-35.33,-34.286
  Bottom Layer w0.406: v1(-37.25,-33.5) -37.25,-10 -35.75,-8.5 R0F2.1@-35.75,-6.455
NetD0F1_2: D0F1.2 D0F2.1 | length 8.1
  Top Layer w0.406: D0F1.2@-35.33,-32.686 D0F2.1@-35.33,-24.556
NetD0F2_2: D0F2.2 D0F3.1 | length 7.9
  Top Layer w0.406: D0F2.2@-35.33,-22.956 D0F3.1@-35.33,-15.086
NetD0F3_2: D0F3.2 Q0F1.3 | length 10.2
  Top Layer w0.406: D0F3.2@-35.33,-13.486 -35.323,-13.493 -34.007,-13.493 v1(-34,-13.5)
  Bottom Layer w0.406: v1(-34,-13.5) -34,-16.32 -30.162,-20.158 -30.162,-20.398 -30.06,-20.5 Q0F1.3@-29.82,-20.5
NetD0G1_1: D0G1.1 R0G2.1 | length 41
  Top Layer w0.406: v1(-29.292,-41.487) -29.285,-41.493 -27.762,-41.493 D0G1.1@-27.755,-41.5
  Bottom Layer w0.406: R0G2.1@-33,-6.455 -33,-9.809 -36.5,-13.309 -36.5,-34.25 -29.292,-41.458 v1(-29.292,-41.487)
NetD0G1_2: D0G1.2 D0G2.1 | length 6.8
  Top Layer w0.406: D0G1.2@-26.155,-41.5 D0G2.1@-19.355,-41.5